# EAGLE board routev6.3 (EAGLE 8.6.0)
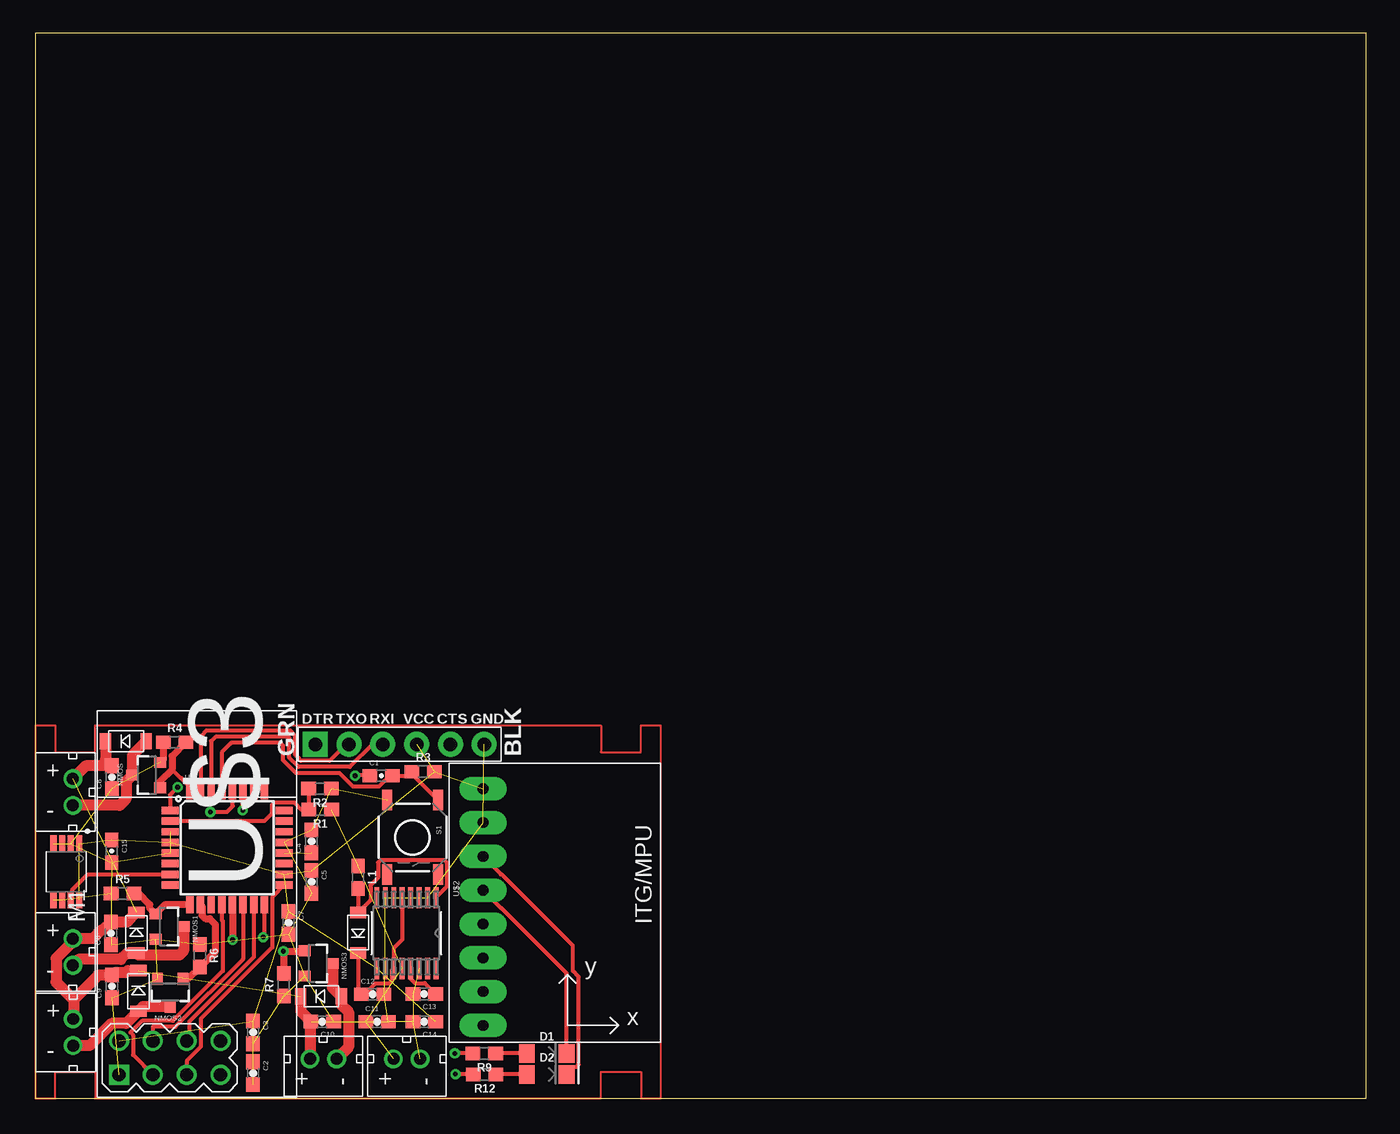
[diagram p0: board, top side]
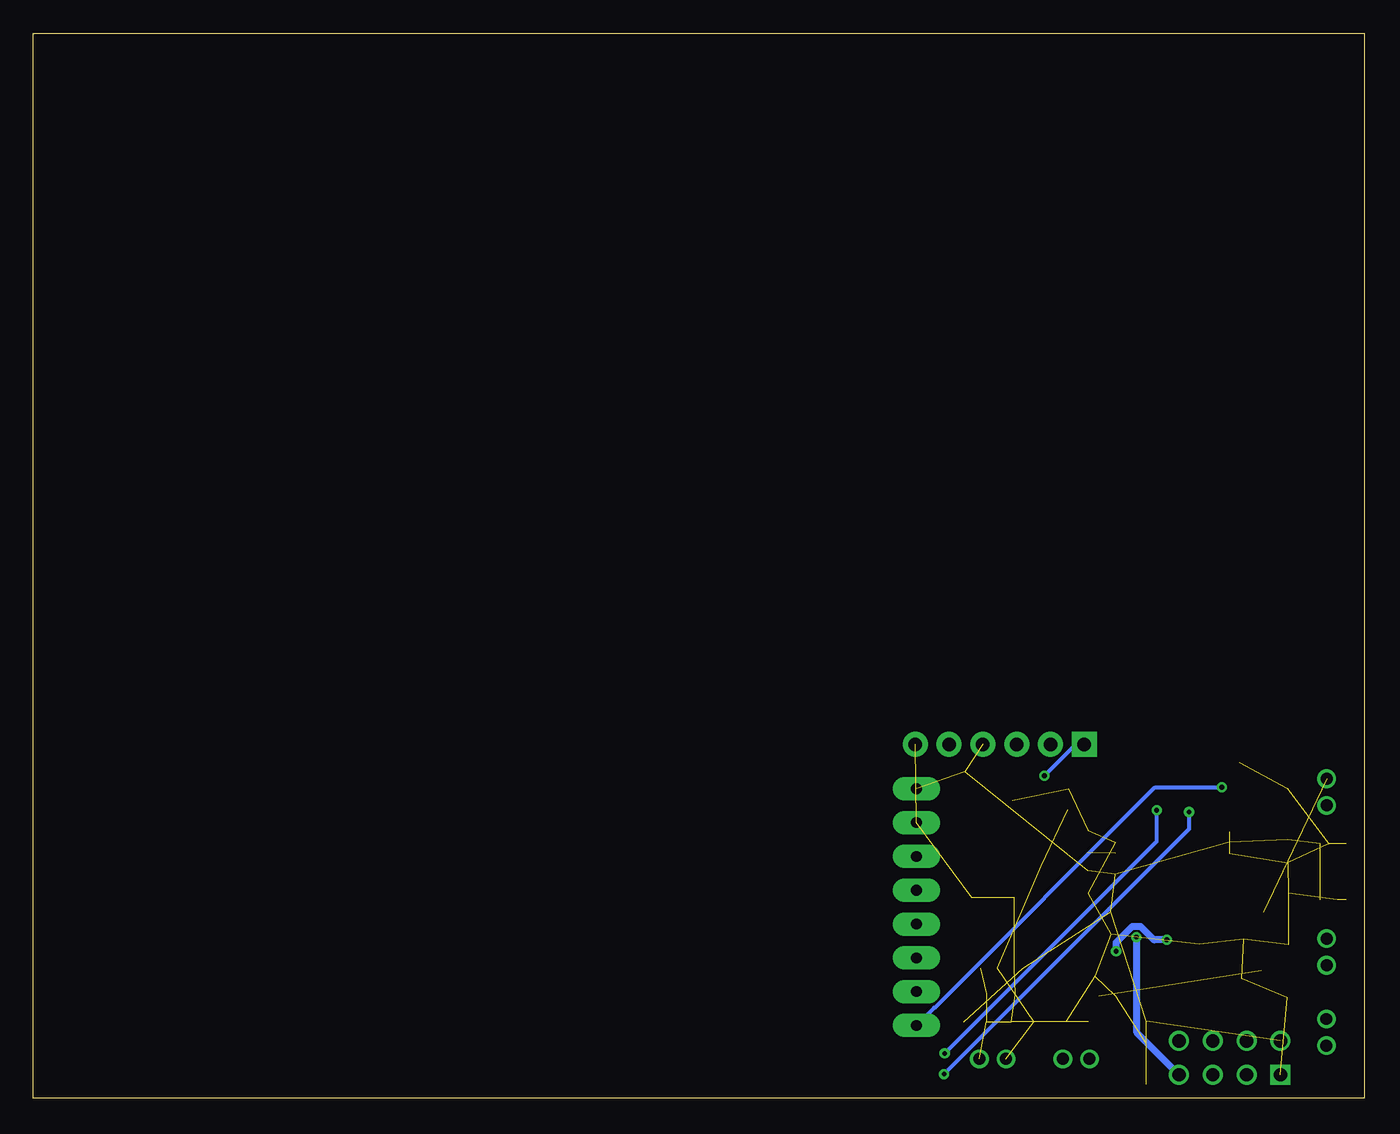
[diagram p1: board, bottom side, seen from below]

Size 100 x 80 mm. Coordinates in mm from the lower left corner, seen from the top.
Outline: 0,0 100,0 100,80 0,80 0,0
Copper layers (1*16): Top 0.035mm / dielectric 1.5mm / Bottom 0.035mm
Design rules "default": minimum track width 6mil, minimum drill 0.35mm, track to track 6mil, track to pad 6mil, pad to pad 6mil, via to via 6mil, smd to smd 6mil, copper to edge 40mil, drill to drill 6mil, minimum pad ring 10mil, minimum via ring 8mil, stop-mask expansion 4mil, vias tented up to drill 0mil, thermal gap 10mil

## Footprints (pad centres in the part's own frame; a part is rotated, then mirrored left to right if it is on the bottom)
0603-CAP = smd 1.1 x 1: 1 -0.85,0; 2 0.85,0
LED-1206 = smd 1.2 x 1.4: A -1.5,0; C 1.5,0
MINI2-F3-B = smd 1.22 x 0.85: NEG 0,1.55; POS 0,-1.5
FTDI_DEVICE_SIDE = drill 1.016 pad 1.88 square: P$1 -6.35,0 | drill 1.016 pad 1.88: P$2 -3.81,0; P$3 -1.27,0; P$4 1.27,0; P$5 3.81,0; P$6 6.35,0
0603 = smd 1.1 x 1: 1 -0.85,0; 2 0.85,0
WIRELESS-NRF24L01 = drill 1 square: 1 -12.7,6.35 | drill 1: 2 -10.16,6.35; 3 -12.7,3.81; 4 -10.16,3.81; 5 -12.7,1.27; 6 -10.16,1.27; 7 -12.7,-1.27; 8 -10.16,-1.27
JST_CONNECTOR_FEMALE = drill 0.889: + 0,1; - 0,-1
SOT23-3 = smd 0.8 x 0.9: 1 -0.95,-1; 2 0.95,-1; 3 0,1.1
TACTILE-SWITCH-SMD = smd 1.524 x 0.762: 1 -2.794,1.905; 2 2.794,1.905; 3 -2.794,-1.905; 4 2.794,-1.905
GY-521 = drill 0.8 pad 1.778 long: ADO -8.89,-6.35; GND -8.89,6.35; INT -8.89,-8.89; SCL -8.89,3.81; SDA -8.89,1.27; VCC -8.89,8.89; XCL -8.89,-3.81; XDA -8.89,-1.27
TQFP32-08 = smd 1.27 x 0.559: 1 -4.293,2.8; 2 -4.293,2; 3 -4.293,1.2; 4 -4.293,0.4; 5 -4.293,-0.4; 6 -4.293,-1.2; 7 -4.293,-2; 8 -4.293,-2.8; 17 4.293,-2.8; 18 4.293,-2; 19 4.293,-1.2; 20 4.293,-0.4; 21 4.293,0.4; 22 4.293,1.2; 23 4.293,2; 24 4.293,2.8 | smd 0.559 x 1.27: 9 -2.8,-4.293; 10 -2,-4.293; 11 -1.2,-4.293; 12 -0.4,-4.293; 13 0.4,-4.293; 14 1.2,-4.293; 15 2,-4.293; 16 2.8,-4.293; 25 2.8,4.293; 26 2,4.293; 27 1.2,4.293; 28 0.4,4.293; 29 -0.4,4.293; 30 -1.2,4.293; 31 -2,4.293; 32 -2.8,4.293
21-0055H_16 = smd 1.6 x 0.356: 1 -2.654,2.223; 2 -2.654,1.587; 3 -2.654,0.953; 4 -2.654,0.318; 5 -2.654,-0.318; 6 -2.654,-0.953; 7 -2.654,-1.587; 8 -2.654,-2.223; 9 2.654,-2.223; 10 2.654,-1.587; 11 2.654,-0.953; 12 2.654,-0.318; 13 2.654,0.318; 14 2.654,0.953; 15 2.654,1.587; 16 2.654,2.223
SOP65P490X110-8N = smd 1.25 x 0.46: 1 -2.11,0.975; 2 -2.11,0.325; 3 -2.11,-0.325; 4 -2.11,-0.975; 5 2.11,-0.975; 6 2.11,-0.325; 7 2.11,0.325; 8 2.11,0.975

## Placement (x,y rotation side)
C1  100nF  [0603-CAP]  25.98,24.23 0 top
C2  10uF  [0603-CAP]  16.36,1.91 270 top
C3  100nF  [0603-CAP]  16.36,4.95 270 top
C4  100nF  [0603-CAP]  20.75,19.3 90 top
C5  100nF  [0603-CAP]  20.75,16.26 270 top
C6  100uF  [0603-CAP]  5.69,12.4 90 top
C7  100nF  [0603-CAP]  19.02,13.18 270 top
C8  100uF  [0603-CAP]  5.77,24.13 90 top
C9  100uF  [0603-CAP]  5.77,8.41 90 top
C10  100uF  [0603-CAP]  21.56,5.77 180 top
C11  100uF  [0603-CAP]  25.68,5.76 0 top
C12  100uF  [0603-CAP]  25.34,7.82 0 top
C13  0.1uF  [0603-CAP]  29.23,7.84 180 top
C14  4.7uF  [0603-CAP]  29.23,5.76 180 top
C15  100nF  [0603-CAP]  5.74,18.57 270 top
D1  Yellow  [LED-1206]  38.43,3.38 0 top
D2  Yellow  [LED-1206]  38.43,1.8 0 top
DIODE  DB2W40300L  [MINI2-F3-B]  6.83,26.82 90 top
DIODE1  DB2W40300L  [MINI2-F3-B]  7.59,12.42 0 top
DIODE2  DB2W40300L  [MINI2-F3-B]  7.75,8.05 0 top
DIODE3  DB2W40300L  [MINI2-F3-B]  21.49,7.67 90 top
DIODE4  DB2W40300L  [MINI2-F3-B]  24.25,12.47 180 top
J2  FTDI_DEVICE  [FTDI_DEVICE_SIDE]  27.38,26.59 0 top
L1  10uH  [0603]  24.25,16.61 270 top
M1  WIRELESS-NRF24L01  [WIRELESS-NRF24L01]  12.65,14.48 90 top
MOTOR  JST_CONNECTOR_FEMALE  [JST_CONNECTOR_FEMALE]  2.82,23.01 0 top
MOTOR1  JST_CONNECTOR_FEMALE  [JST_CONNECTOR_FEMALE]  2.82,11 0 top
MOTOR2  JST_CONNECTOR_FEMALE  [JST_CONNECTOR_FEMALE]  2.84,4.97 0 top
MOTOR3  JST_CONNECTOR_FEMALE  [JST_CONNECTOR_FEMALE]  21.64,2.97 90 top
NMOS  N-CHANNEL-MOSFET-IRLML6244TRPBF  [SOT23-3]  8.38,24.28 90 top
NMOS1  N-CHANNEL-MOSFET-IRLML6244TRPBF  [SOT23-3]  10.03,12.9 270 top
NMOS2  N-CHANNEL-MOSFET-IRLML6244TRPBF  [SOT23-3]  10.13,8 180 top
NMOS3  N-CHANNEL-MOSFET-IRLML6244TRPBF  [SOT23-3]  21.23,10.13 270 top
R1  2.2k  [0603]  21.41,21.69 180 top
R2  2.2k  [0603]  21.39,23.27 180 top
R3  10k  [0603]  29.13,24.54 0 top
R4  10k  [0603]  10.46,26.75 0 top
R5  10k  [0603]  6.55,15.39 0 top
R6  10k  [0603]  12.37,10.72 270 top
R7  10k  [0603]  18.67,8.53 90 top
R9  1k  [0603]  33.73,3.38 180 top
R12  1k  [0603]  33.76,1.8 180 top
S1  SWITCH-MOMENTARY-2SMD  [TACTILE-SWITCH-SMD]  28.35,19.61 270 top
U2  GY-521MPU6050  [GY-521]  42.54,14.37 0 top
U3  ATMEGA328P_TQFP  [TQFP32-08]  14.41,18.83 0 top
U$1  JST_CONNECTOR_FEMALE  [JST_CONNECTOR_FEMALE]  27.91,2.97 90 top
U$2  MAX1672'MAX1672'  [21-0055H_16]  27.89,12.41 270 top
U$3  LTC6930CMS8-8.19LTC6930CMS8-8.19  [SOP65P490X110-8N]  2.34,17.02 270 top

## Library data of the parts
C1 C15 = SparkFun-Capacitors; PROD_ID: CAP-00810
C2-C14 = SparkFun-Passives
D1 D2 = SparkFun-LED; PROD_ID: DIO-09909
DIODE DIODE1-DIODE4 J2 M1 MOTOR MOTOR1-MOTOR3 U2 U$1 = quad
L1 = SparkFun-Coils; PROD_ID: NDUC-07874
NMOS NMOS1-NMOS3 = quad; DATASHEET: http://www.mouser.com/ds/2/196/irlml6244pbf-936666.pdf; MOUSER: 942-IRLML6244TRPBF; URL: http://www.mouser.com/Search/ProductDetail.aspx?R=IRLML6244TRPBFvirtualkey57370000virtualkey942-IRLML6244TRPBF
R1-R7 R9 R12 = SparkFun-Resistors; PROD_ID: RES-08272
S1 = quad; PROD_ID: SWCH-08247
U3 = quad; PROD_ID: IC-09069
U$2 = voltreg
U$3 = LTC6390

## Nets
BATTERY+: C6.2 C8.2 C9.2 C10.2 C11.1 DIODE1.NEG DIODE2.NEG DIODE3.NEG DIODE.NEG L1.1 MOTOR1.+ MOTOR2.+ MOTOR3.+ MOTOR.+ R1.1 U$1.+ U$2.12
FTDI-RX: J2.P$3 U3.30
FTDI-TX: J2.P$2 U3.31
GND: C2.2 C3.2 C4.2 C5.2 C6.1 C7.2 C8.1 C9.1 C10.1 C11.2 C12.2 C13.2 C14.2 C15.2 J2.P$6 M1.1 NMOS1.2 NMOS2.2 NMOS3.2 NMOS.2 R2.1 R4.1 R5.1 R6.1 R7.1 S1.3 U2.GND U3.3 U3.5 U3.21 U$1.- U$2.2 U$2.6 U$2.7 U$2.10 U$2.14 U$3.2 U$3.3 U$3.4 U$3.5 U$3.6
IMU-INT: U2.INT U3.1
IMU-SCL: D2.C U2.SCL
IMU-SDA: D1.C U2.SDA
MEASURE_PIN: R1.2 R2.2 U3.2
MOTOR1: NMOS.1 R4.2 U3.32
MOTOR2: NMOS1.1 R5.2 U3.9
MOTOR3: NMOS2.1 R6.2 U3.10
MOTOR4: NMOS3.1 R7.2 U3.13
N$1: DIODE4.POS L1.2 U$2.1
N$2: C4.1 U3.20
N$3: D1.A R9.1
N$4: DIODE1.POS MOTOR1.- NMOS1.3
N$5: DIODE2.POS MOTOR2.- NMOS2.3
N$6: DIODE.POS MOTOR.- NMOS.3
N$7: DIODE3.POS MOTOR3.- NMOS3.3
N$8: R9.2 U3.27
N$9: D2.A R12.1
N$10: R12.2 U3.28
N$12: C1.1 J2.P$1
OSC1: U3.7 U$3.7
RESET: C1.2 R3.1 S1.1 U3.29
RF-CE: M1.3 U3.12
RF-CSN: M1.4 U3.14
RF-MISO: M1.7 U3.16
RF-MOSI: M1.6 U3.15
RF-SCK: M1.5 U3.17
VCC: C2.1 C3.1 C5.1 C7.1 C14.1 C15.1 J2.P$4 M1.2 R3.2 U2.VCC U3.4 U3.18 U$2.9 U$3.1 U$3.8
VR-PS: C12.1 DIODE4.NEG U$2.5 U$2.11
VR-REF: C13.1 U$2.13

## Tracks (layer width: path | path; a pad name or v marks a point on that pad's centre or on a via)
BATTERY+  (7 unrouted)
  Top 0.813: DIODE1.NEG 6.87,13.24 C6.2 5.1,12.65 4.96,12.65 4.3,12 MOTOR1.+ 2.82,11.78 1.56,10.52 1.56,8.72 2.87,7.42 | DIODE2.NEG 6.95,9.6 6.82,9.47 5.98,9.47 C9.2 4.71,9.26 2.87,7.42 | 2.87,7.42 2.87,5.99 MOTOR2.+ | DIODE.NEG 5.28,25.46 C8.2 3.79,24.98 MOTOR.+ | DIODE3.NEG 19.94,6.54 C10.2 20.64,5.69 MOTOR3.+
FTDI-RX
  Top 0.305: J2.P$3 25.33,26.59 23.63,24.89 19.78,24.89 19.07,25.59 19.07,27.07 18.98,27.16 13.54,27.16 13.21,26.84 U3.30
FTDI-TX
  Top 0.305: J2.P$2 23.34,26.59 22.1,25.35 19.96,25.35 19.79,25.53 19.79,25.55 19.53,25.81 19.53,27.25 19.17,27.62 12.85,27.62 12.41,27.18 U3.31
GND  (39 unrouted)
  Top 0.508: R4.1 9.62,25.46 NMOS.2
  Top 0.813: C12.2 26.22,7.84
IMU-INT  (via drill 0.35)
  Top 0.305: v10.69,23.37 10.14,22.81 10.12,22.79 U3.1
  Bottom 0.305: U2.INT 32.3,6.83 32.27,6.83 15.72,23.37 v10.69,23.37
IMU-SCL
  Top 0.305: U2.SCL 34.99,16.83 35.03,16.83 40.39,11.48 40.39,9.58 40.84,9.14 40.84,2.55 40.66,2.37 40.5,2.37 D2.C
IMU-SDA
  Top 0.305: U2.SDA 34.99,14.29 35.03,14.29 39.93,9.39 D1.C
MEASURE_PIN
  Top 0.305: R2.2 20.54,21.72 R1.2 19.99,21.69 19.47,22.21 17.95,22.21 17.77,22.03 17.77,21.4 17.2,20.83 U3.2
MOTOR1
  Top 0.305: 10.28,24.7 10.93,24.05 10.98,24.05 11.61,23.41 U3.32
  Top 0.508: R4.2 10.28,25.71 10.28,24.7 9.38,23.81 NMOS.1
MOTOR2
  Top 0.508: U3.9 9.72,14.54 NMOS1.1 8.61,14.28 8.61,14.56 7.78,15.39 R5.2
MOTOR3
  Top 0.508: U3.10 12.53,14.42 12.53,13.73 12.77,13.49 13.11,13.49 13.53,13.07 13.53,11.03 R6.2 11.5,9 NMOS2.1
MOTOR4  (via drill 0.35)
  Top 0.508: U3.13 14.81,11.93 v14.83,11.91 | NMOS3.1 20.2,11.05 v18.64,11.05 18.64,9.41 R7.2
  Bottom 0.508: v14.83,11.91 15.8,11.91 16.79,12.9 17.44,12.9 18.64,11.7 v18.64,11.05
N$1
  Top 0.305: U$2.1 30.11,15.1 30.94,15.93 30.94,17.7 30.76,17.88 25.93,17.88 25.76,17.7 25.76,16.57 25.18,16 25.18,14.89 DIODE4.POS L1.2
N$2  (1 unrouted)
N$3
  Top 0.305: D1.A R9.1
N$4
  Top 0.813: NMOS1.3 11.13,11.08 10.82,10.77 7.75,10.77 DIODE1.POS 6.91,10.92 6.42,10.44 3.26,10.44 MOTOR1.-
N$5
  Top 0.813: NMOS2.3 8.1,6.9 DIODE2.POS 6.83,5.63 5.75,5.63 4.08,3.97 MOTOR2.-
N$6
  Top 0.813: DIODE.POS 7.28,25.77 NMOS.3 6.83,23.82 6.83,22.5 6.34,22.01 MOTOR.-
N$7
  Top 0.813: NMOS3.3 22.33,8.32 DIODE3.POS 22.99,7.03 23.52,6.5 23.52,3.85 MOTOR3.-
N$8  (via drill 0.35)
  Top 0.305: R9.2 v31.52,3.38 | v15.6,21.64 15.6,23.1 U3.27
  Bottom 0.305: v31.52,3.38 15.6,19.3 v15.6,21.64
N$9
  Top 0.305: D2.A R12.1
N$10  (via drill 0.35)
  Top 0.305: R12.2 32.88,1.83 v31.57,1.83 | v13.16,21.51 14.4,21.51 14.83,21.95 14.81,21.97 U3.28
  Bottom 0.305: v31.57,1.83 13.16,20.24 v13.16,21.51
N$11
  Top 0.152: 0,0 1.5,0 1.5,2 4.5,2 4.5,0 42.5,0 42.5,2 45.5,2 45.5,0 47,0 47,28 45.5,28 45.5,26 42.5,26 42.5,28 4.5,28 4.5,26 1.5,26 1.5,28 0,28 0,0
N$12  (via drill 0.35)
  Top 0.305: C1.1 25.08,24.28 24.08,24.28 v24.03,24.23
  Bottom 0.305: v24.03,24.23 21.67,26.59 J2.P$1
OSC1
  Top 0.305: U$3.7 2.78,15.02 2.78,15.66 3.95,16.83 U3.7
RESET
  Top 0.305: S1.1 28.28,24.37 R3.1 27.98,24.23 C1.2 26.61,24.23 25.81,23.43 23.87,23.43 22.86,24.43 19.59,24.43 18.62,25.4 18.62,26.49 18.41,26.7 14.73,26.7 14.01,25.99 U3.29
RF-CE
  Top 0.305: U3.12 14.01,13.38 14.09,13.31 14.09,9.57 10.34,5.82 8.02,5.82 7.16,4.96 7.36,4.76 7.36,3.26 M1.3
RF-CSN
  Top 0.305: U3.14 15.61,10.45 10.53,5.37 8.84,5.37 M1.4
RF-MISO  (via drill 0.35)
  Top 0.305: U3.16 17.21,12.13 17.2,12.12 v17.11,12.12
  Bottom 0.508: v17.11,12.12 17.11,4.98 M1.7
RF-MOSI
  Top 0.305: U3.15 16.41,10.61 11.58,5.77 11.58,4.52 M1.6
RF-SCK
  Top 0.305: U3.17 17.8,15.12 17.8,11.34 12.44,5.98 12.44,3.88 11.38,2.82 M1.5
VCC  (14 unrouted)
VR-PS
  Top 0.305: DIODE4.NEG 24.25,8.06 C12.1 24.71,7.82 25.52,8.62 26.57,8.62 26.78,8.83 26.78,9.61 U$2.11 26.92,11.28 27.57,11.92 U$2.5
VR-REF
  Top 0.305: C13.1 29.27,8.66 28.53,8.66 28.2,8.99 U$2.13